# Altium PCB Robonaut2.PcbDoc
Units mm, origin at the board's own origin, x right, y up, seen from the top; angles counter-clockwise.
Board outline 105.5 x 105 mm, 2 copper layers (Top Layer, Bottom Layer); 57 components, 72 nets, 320 pads, 37 vias.
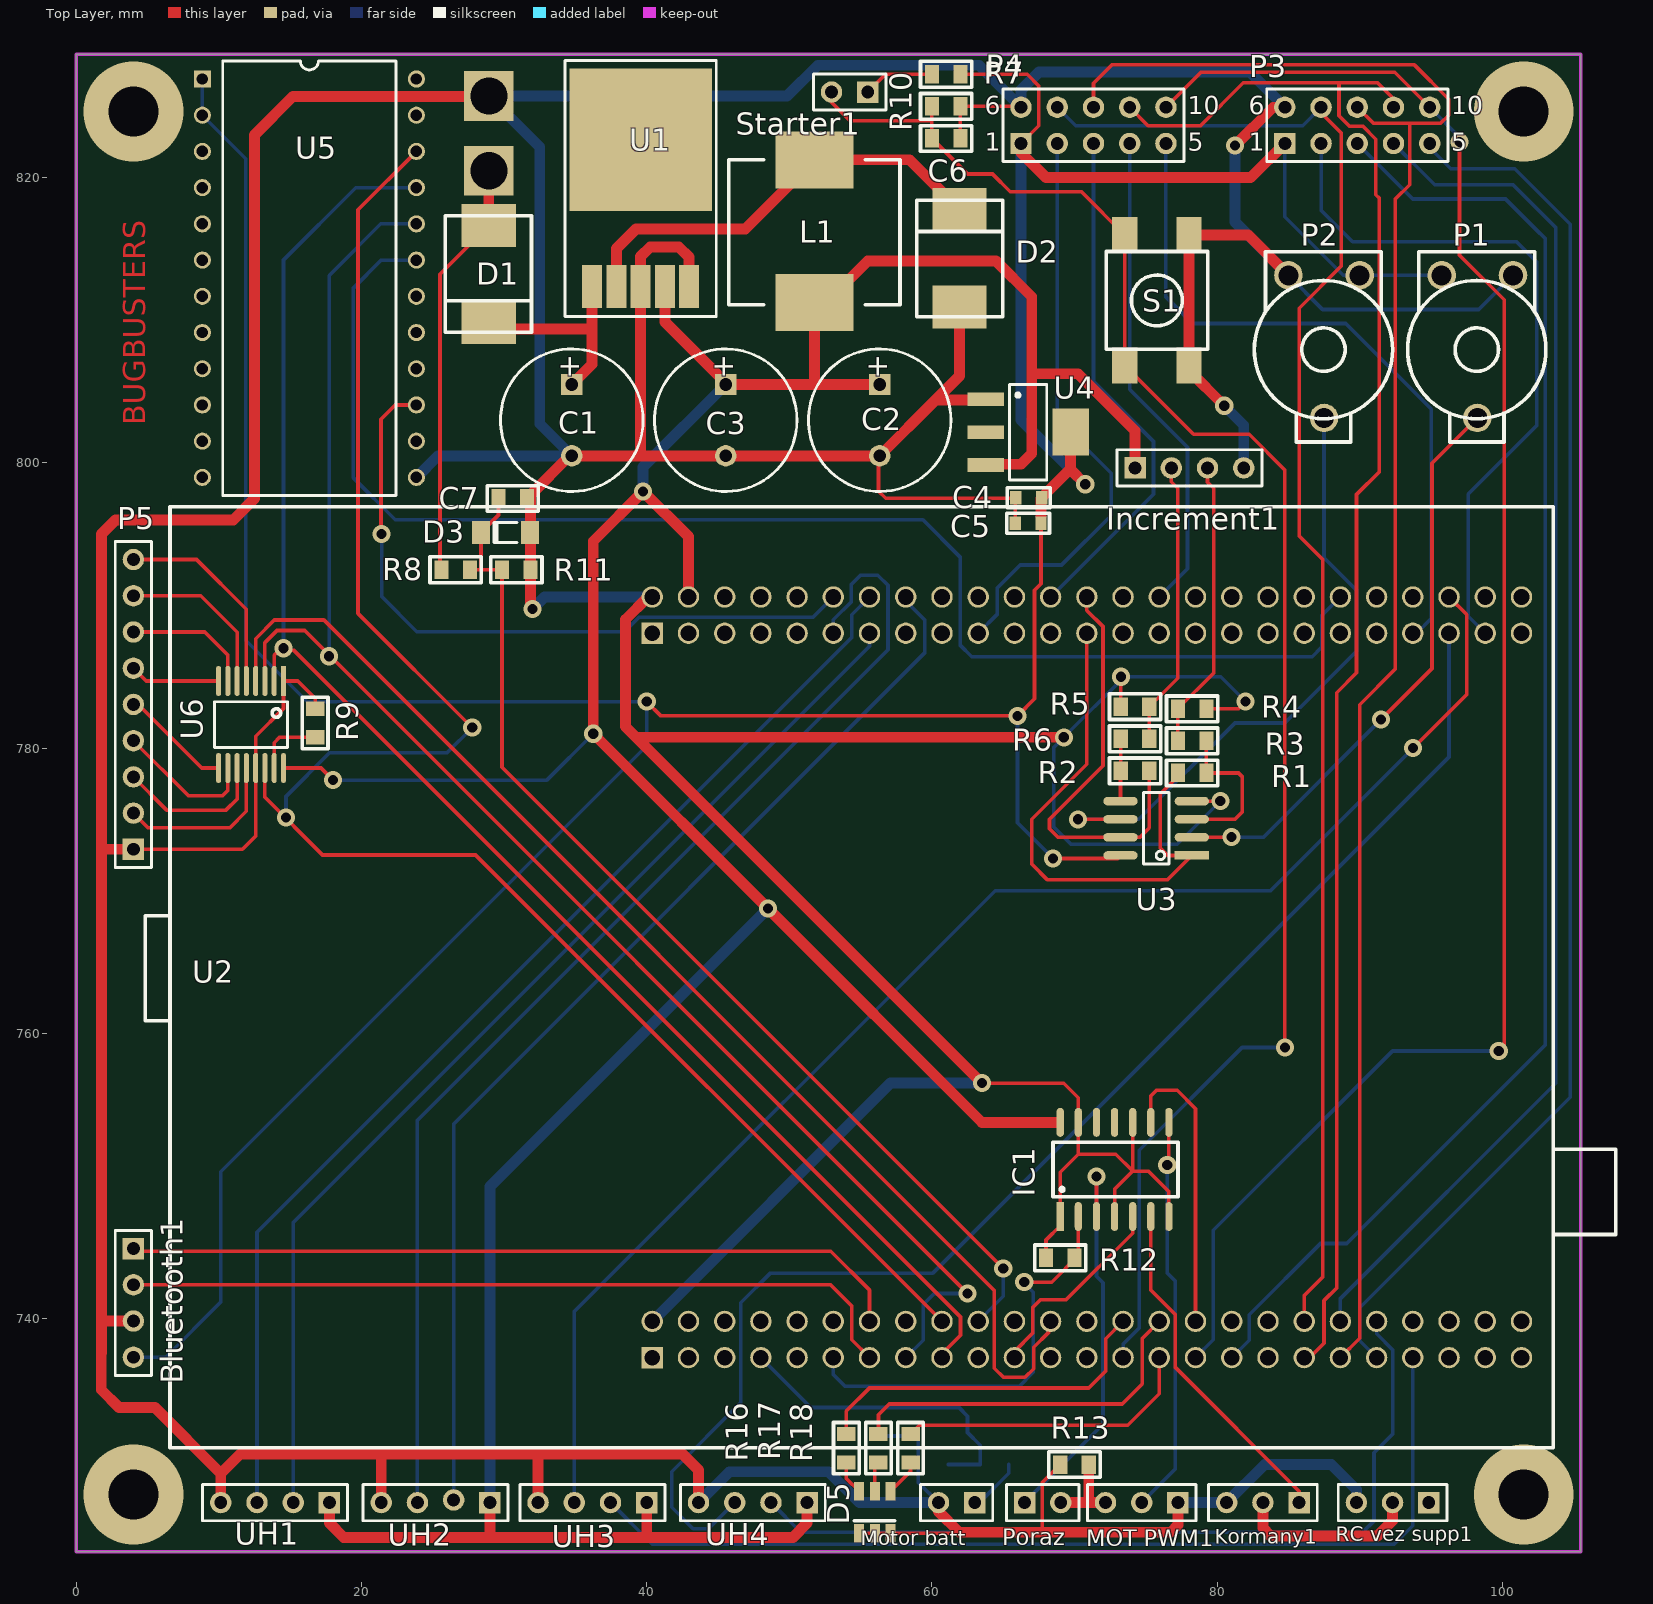
[diagram p0: Top Layer view]
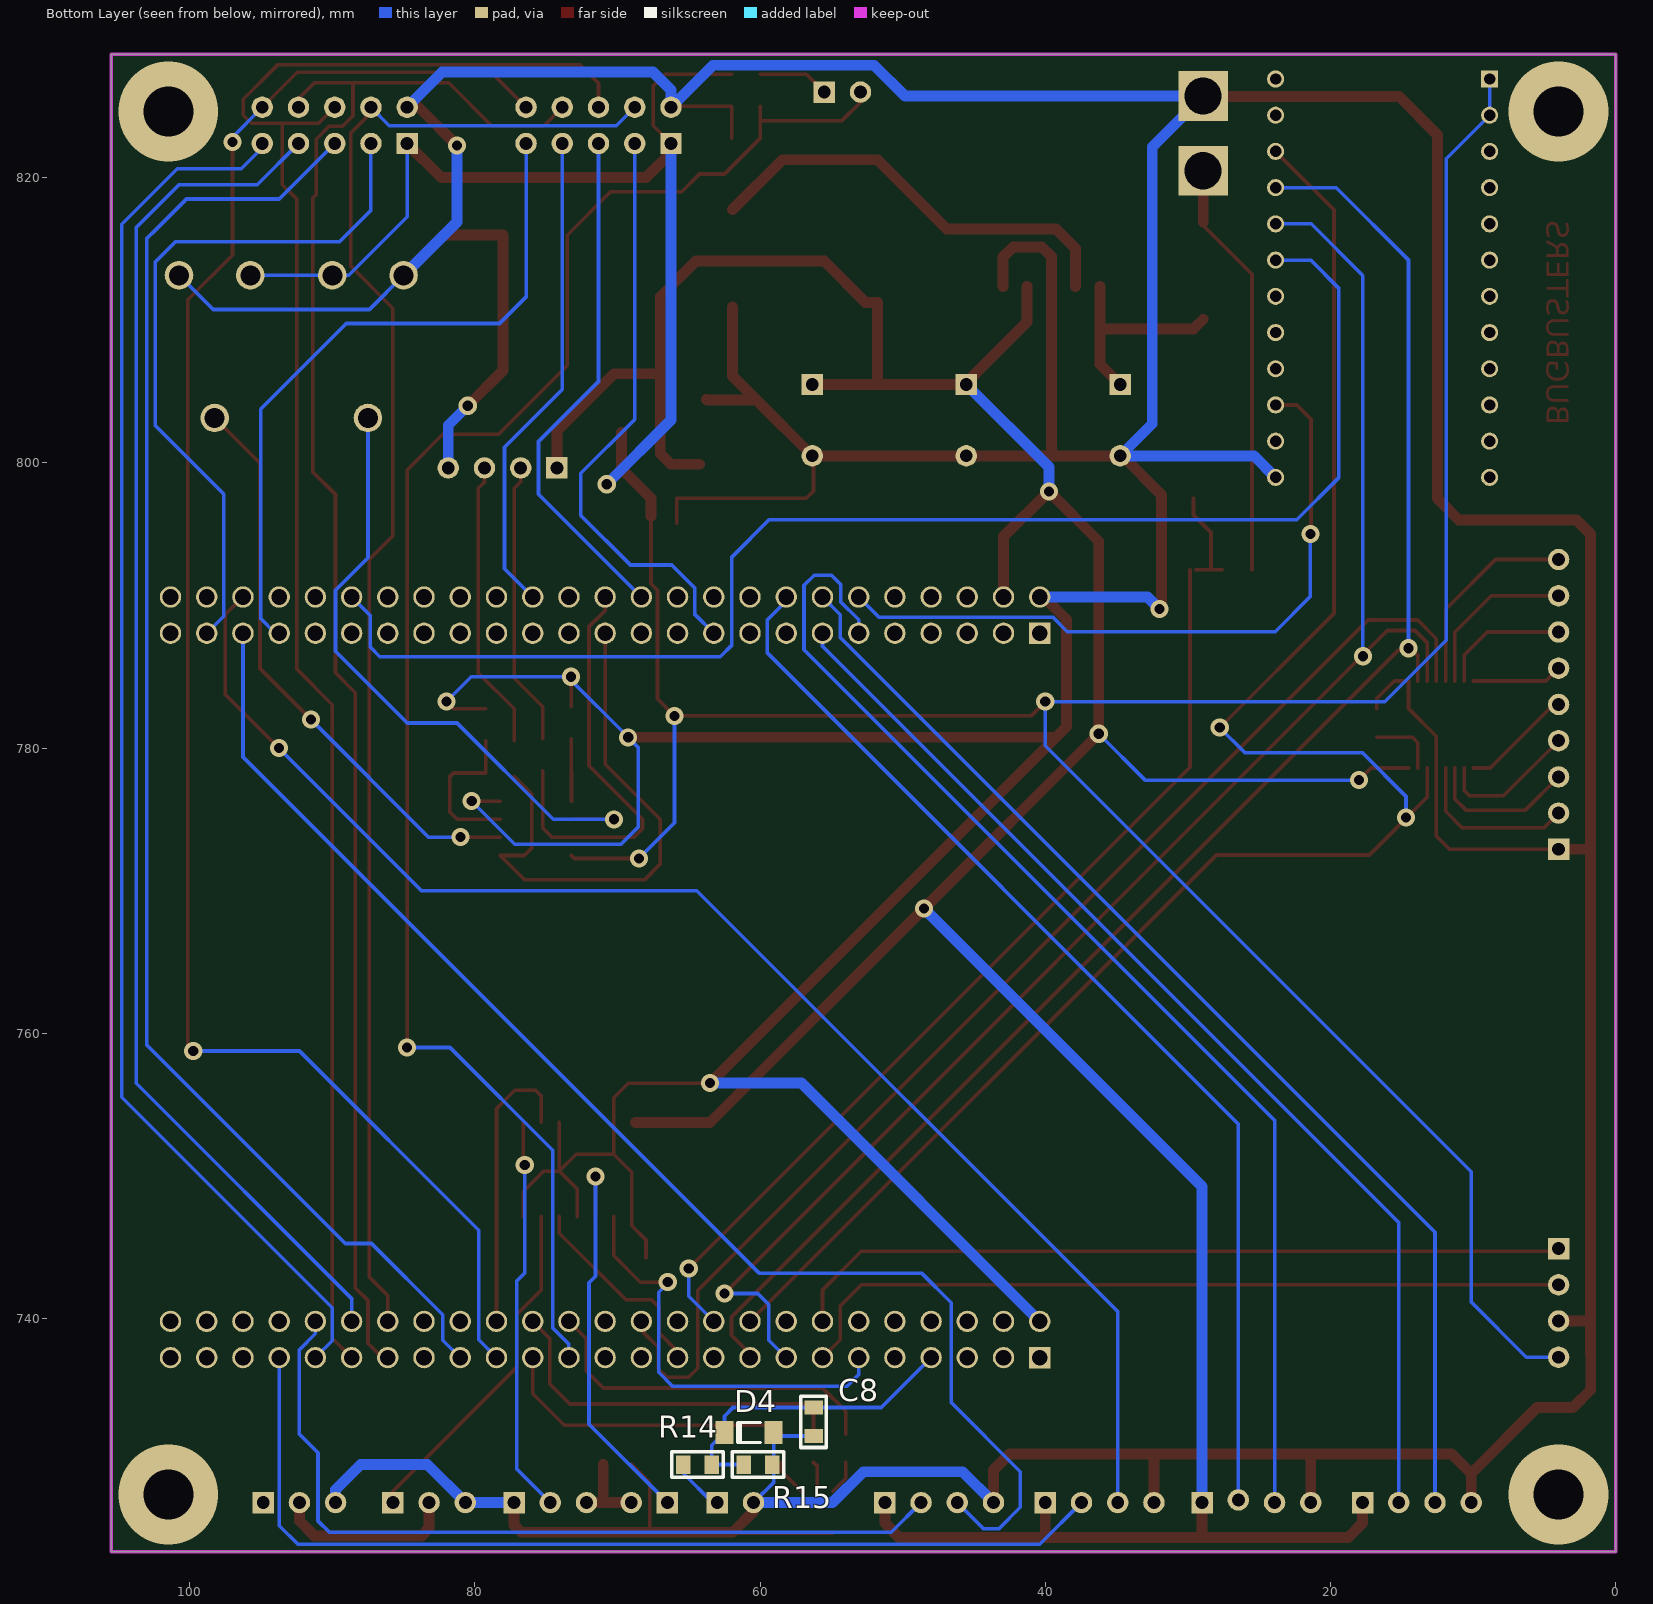
[diagram p1: Bottom Layer view, seen from below]
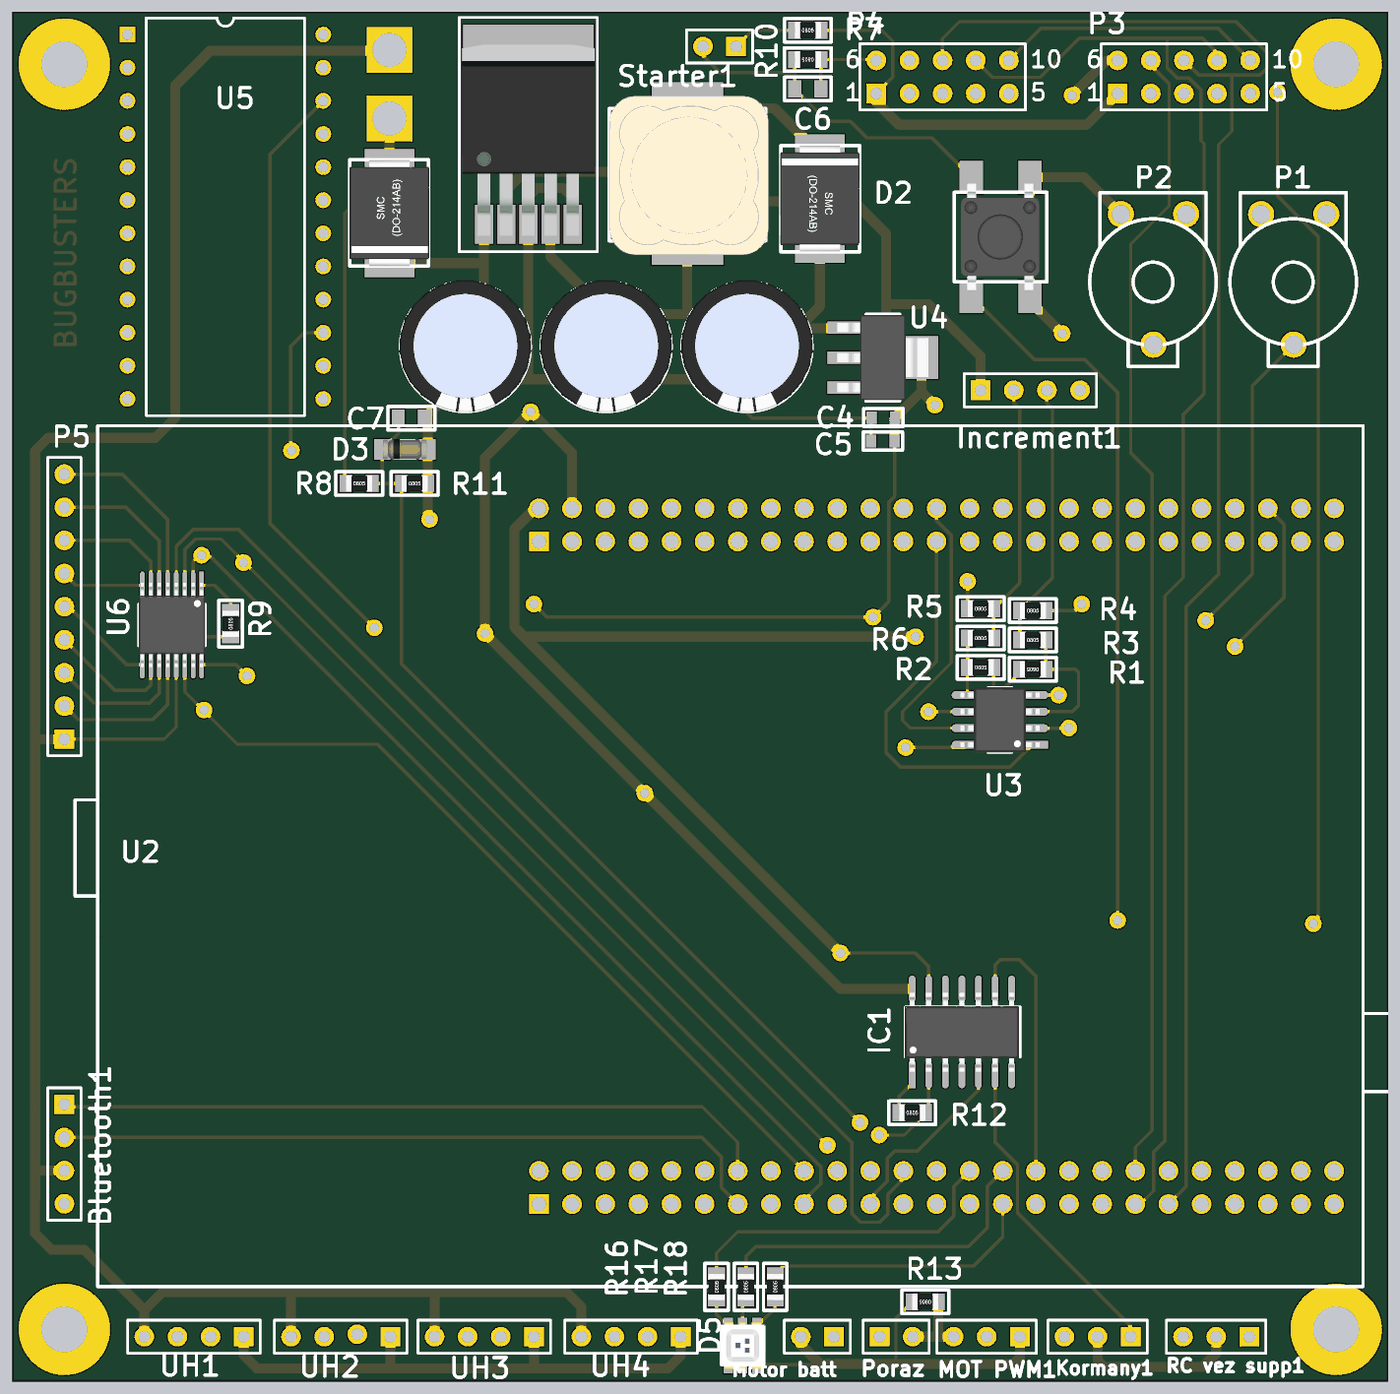
[diagram p2: 3D render of the assembled board from above, using the file's embedded part models]
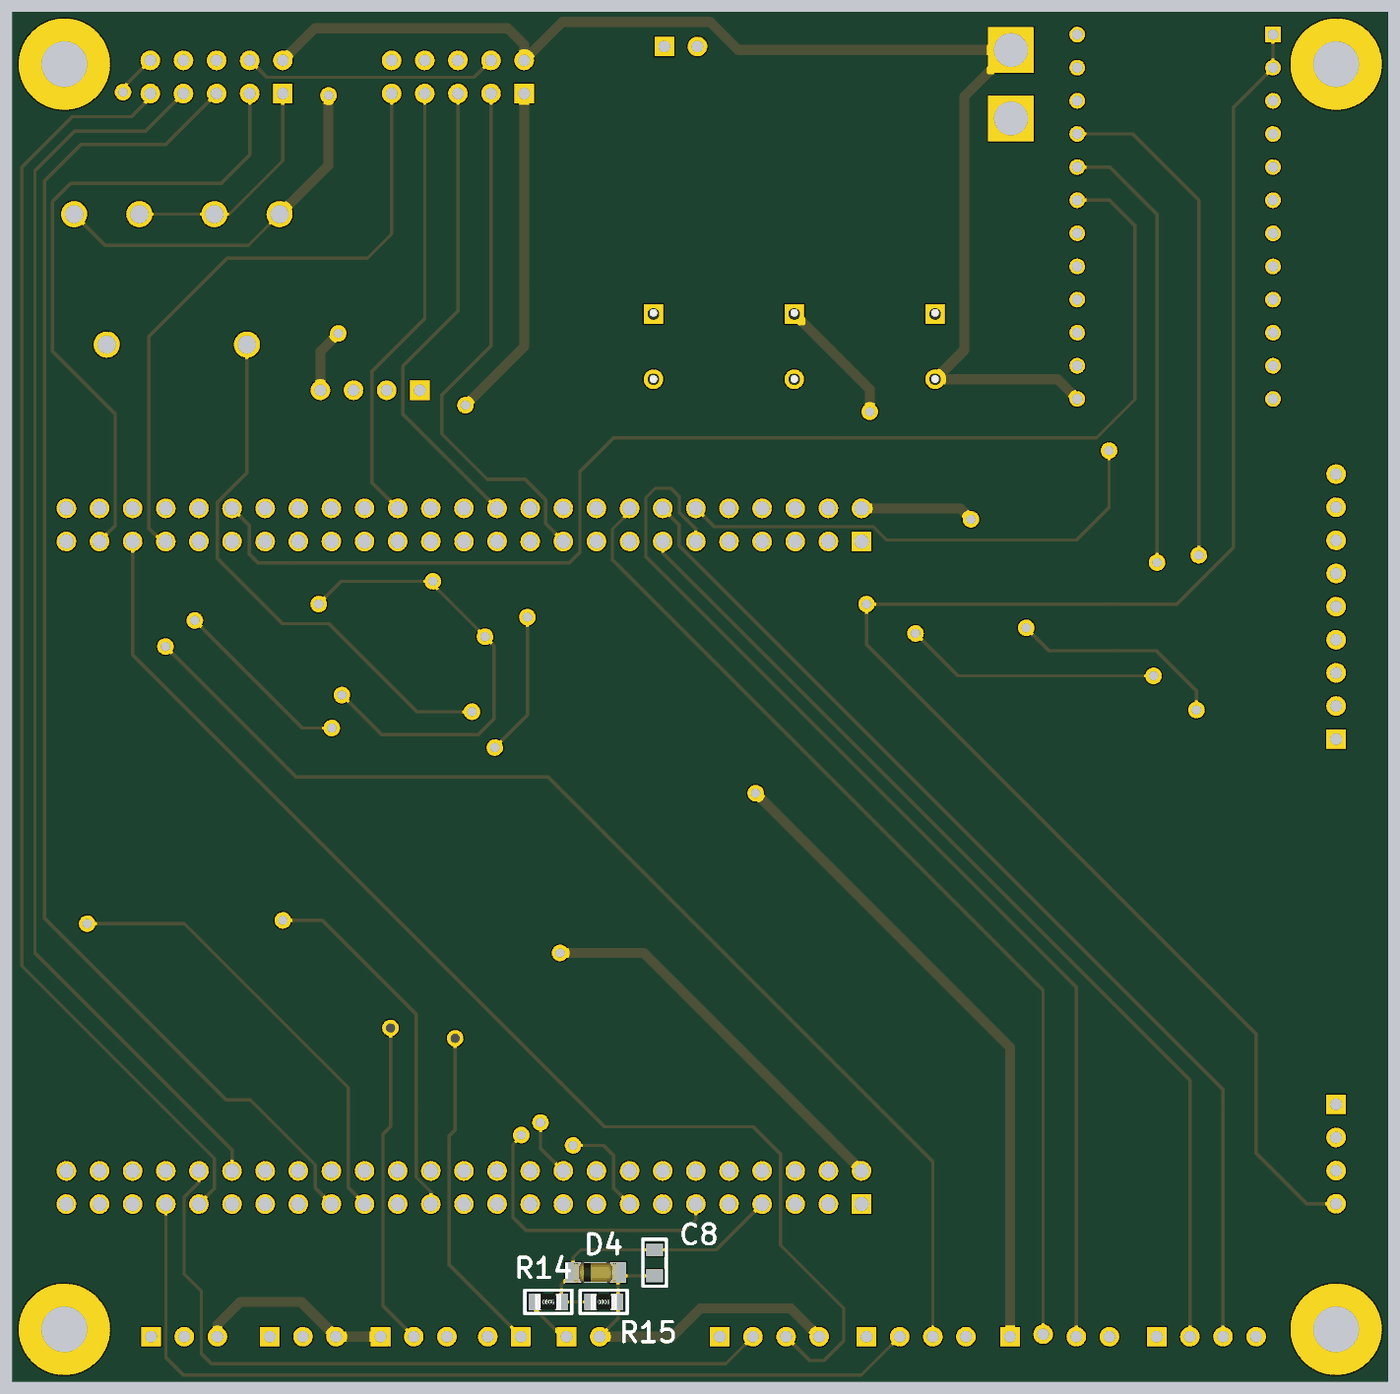
[diagram p3: 3D render of the assembled board from below, using the file's embedded part models]

## Layer stack, top to bottom
Top Layer: signal copper 0.0356
Dielectric: dielectric 0.32, FR-4, Dk 4.8
Bottom Layer: signal copper 0.0356

## Board outline
0,723.646 105.5,723.646 105.5,828.646 0,828.646

## Design rules (kind name [scope] priority, off if disabled: settings)
Clearance [All] p1: gap=0.254
HoleSize [All] p1: absolutevalues=TRUE maxlimit=4 minlimit=0.025 maxpercent=80.000 minpercent=20.000
MinimumSolderMaskSliver MinimumSolderMaskSliver_U6 [InComponent('U6')  or InComponent('U1')  or InComponent('D5')] p1: minsoldermaskwidth=0.051
MinimumSolderMaskSliver [All] p2: minsoldermaskwidth=0.254
PolygonConnect [All] p1: connectstyle=Relief reliefconductorwidth=0.254 reliefentries=4 polygonreliefangle="90 Angle"
RoutingVias [All] p1: holewidth=0.711 width=1.27 viastyle="Through Hole" minholewidth=0.711 minwidth=1.27 maxholewidth=4 maxwidth=8
SilkToSilkClearance [All] p1 off: silktosilkclearance=0.254
SilkscreenOverComponentPads [All] p1 off: minsilkscreentomaskgap=0.254
SolderMaskExpansion [All] p1: expansion=0.102
Width [All] p1: maxlimit=1.524 minlimit=0.254 preferedwidth=0.254
24 further rules are at their usual default settings.

## Components (designator, comment, footprint, x,y, rotation, side; value= is the part's Value field where it differs from the comment)
Bluetooth1 "Header 4" HDR1X4#1 4,744.896 r270 top
C1 "470uF" cap_10x12 34.746,803.041 r180 top
C2 "470uF" cap_10x12 56.336,803.041 r180 top
C3 "470uF" cap_10x12 45.541,803.041 r180 top
C4 "10uF" FP_0603_CAP_080 66.79,797.546 r0 top
C5 "10uF" FP_0603_CAP_080 66.75,795.75 r0 top
C6 "100nF" FP_0805_CAP_085 61,822.75 r180 top
C7 "100nF" FP_0805_CAP_085 30.604,797.5 r180 top
C8 "100nF" FP_0805_CAP_085 56.25,732.75 r90 bottom
D1 "SS54" "FP_SMA DO214AB" 28.925,813.233 r270 top
D2 "SS54" "FP_SMA DO214AB" 61.924,814.344 r90 top
D3 "ZENER 3V3" sod-80 30.227,795.111 r90 top
D4 "ZENER 3V3" sod-80 60.646,732 r90 bottom
D5 "LED_RGB_6_PIN" LED_PLCC-6 56,726.396 r270 top
IC1 "74HC125" Gate_SOIC14 69,747.146 r0 top
Increment1 "Header 4" HDR1X4#1 74.25,799.646 r0 top
Kormany1 "Header 3" HDR1X3 85.75,727.083 r180 top
L1 "470uH" SRR1206_T 51.764,816.249 r270 top
"MOT PWM1" "Header 3" HDR1X3 77.25,727.083 r180 top
"Motor batt" "Header 2" HDR1X2 63,727.083 r180 top
P1 "10k" "Res Trimmer TH" 100.75,813.146 r180 top
P2 "10k" "Res Trimmer TH" 90,813.146 r180 top
P3 "Header 5X2A" HDR2X5_CEN 84.75,822.396 r0 top
P4 "Header 5X2A" HDR2X5_CEN 66.25,822.396 r0 top
P5 "Header 9" HDR1X9 4,772.896 r90 top
Poraz "Header 2" HDR1X2 66.5,727.083 r0 top
R1 "1M" FP_0805_RES 78.25,778.25 r180 top
R2 "1M" FP_0805_RES 74.25,778.396 r0 top
R3 "20k" FP_0805_RES 78.25,780.5 r0 top
R4 "xR" FP_0805_RES 78.25,782.75 r0 top
R5 "xR" FP_0805_RES 74.25,782.896 r0 top
R6 "20k" FP_0805_RES 74.25,780.646 r0 top
R7 "1k" FP_0805_RES 61,827.25 r0 top
R8 "27K" FP_0805_RES 26.604,792.5 r0 top
R9 "10k" FP_0805_RES 16.75,781.75 r90 top
R10 "10k" FP_0805_RES 61,825 r180 top
R11 "3K" FP_0805_RES 30.854,792.5 r0 top
R12 "10k" FP_0805_RES 69,744.25 r0 top
R13 "10k" FP_0805_RES 70,729.75 r180 top
R14 "27K" FP_0805_RES 64.396,729.75 r180 bottom
R15 "3K" FP_0805_RES 60.146,729.75 r180 bottom
R16 "1k" FP_0805_RES 54,730.896 r90 top
R17 "1k" FP_0805_RES 56.25,730.896 r90 top
R18 "1k" FP_0805_RES 58.5,730.896 r90 top
"RC vez supp1" "Header 3" HDR1X3 94.846,727.083 r180 top
S1 "Button" "BUTTON_6X6 _SMD" 75.75,811.396 r90 top
Starter1 "Header 2" HDR1X2 55.5,826 r180 top
U1 "TS2576" "SUPPLY_TO-263 5" 39.572,817.519 r0 top
U2 "STM32_F4_KIT" FP_STM32F4DISC 40.386,737.251 r90 top locked
U3 "LM358" FP_SO8_MS012AA 75.726,774.37 r180 top
U4 "LD1117xx" SUPPLY_SOT223 66.75,802.146 r0 top
U5 "STEVAL-MKI107V2" "STEVAL-MKI107V2 DIL24 Adapter" 8.838,826.917 r0 top
U6 "STP08CP05" TSSOP16 12.25,781.646 r270 top
UH1 "Header 4" HDR1X4#1 17.75,727.083 r180 top
UH2 "Header 4" HDR1X4#2 29,727.083 r180 top
UH3 "Header 4" HDR1X4#1 40,727.083 r180 top
UH4 "Header 4" HDR1X4#1 51.25,727.083 r180 top

## Footprints (in the part's own frame and the unit in brackets; to place one, negate y for a bottom-side part, rotate by r counter-clockwise, add the part's x,y. Pads: shape width x height; smd on the part's side, far side on the other; paste and mask are expansions set on the pad)
"BUTTON_6X6 _SMD" [mil]
  rect 100x70 smd: 1(-180,87.57) 1(180,87.57) 2(-180,-89.59) 2(180,-89.59)
  silkscreen extent -135,-141 135,139, body extent -160,-118 160,118, height 197
cap_10x12 [mm] "height: any, dia:10 RM5.0"
  round 1.5 hole 0.9: N(0,2.551)
  rect 1.5x1.5 hole 0.9: P(0,-2.449)
  silkscreen extent -5,-4.95 5,5.05, body extent -5.06,-5.04 5.06,5.08, height 13.2
FP_0603_CAP_080 [mm] "0.8mm magas 0603 kapacitás"
  rect 0.8x0.95 smd: 1(-0.9,0) 2(0.9,0)
  silkscreen extent -1.5,-0.7 1.5,0.7, body extent -0.8,-0.4 0.76,0.4, height 0.8
FP_0805_CAP_085 [mm] "0805 kapacitás YAGEO 0.85mm magas"
  rect 1x1.3 smd: 1(-1,0) 2(1,0)
  silkscreen extent -1.8,-0.9 1.8,0.9, body extent -1,-0.64 1.03,0.64, height 0.85
FP_0805_RES [mm] "0805 ellenállás"
  rect 1x1.3 smd: 1(-1,0) 2(1,0)
  silkscreen extent -1.8,-0.9 1.8,0.9, body extent -1,-0.62 1,0.63, height 0.62
"FP_SMA DO214AB" [mm] "SMA DO-214AB tok"
  rect 3x3.8 smd: A(-3.416,0) K(3.416,0)
  silkscreen extent -4.09,-3.05 4.06,3, body extent -4.07,-3.05 4.06,3.05, height 2.4
FP_SO8_MS012AA [mm] "SO8 JEDEC MS-012AA, Analog Devices R-8, SO8-SOT96-1, NS M08A"
  rect 2.4x0.6 smd: 1(-2.5,1.905)
  oval 2.4x0.6 smd: 2(-2.5,0.635) 3(-2.5,-0.635) 4(-2.5,-1.905) 5(2.5,-1.905) 6(2.5,-0.635) 7(2.5,0.635) 8(2.5,1.905)
  silkscreen extent -0.9,-2.5 0.9,2.5, body extent -3.03,-2.5 3.03,2.5, height 1.9
FP_STM32F4DISC [mm] "STM32 F4 Discovery evaluation board"
  rect 1.5x1.5 hole 1.1: 1(0,0) 51(50.8,0)
  round 1.5 hole 1.1: 2(2.54,0) 3(0,-2.54) 4(2.54,-2.54) 5(0,-5.08) 6(2.54,-5.08) 7(0,-7.62) 8(2.54,-7.62) 9(0,-10.16) 10(2.54,-10.16) 11(0,-12.7) 12(2.54,-12.7) 13(0,-15.24) 14(2.54,-15.24) 15(0,-17.78) 16(2.54,-17.78) 17(0,-20.32) 18(2.54,-20.32) 19(0,-22.86) 20(2.54,-22.86) 21(0,-25.4) 22(2.54,-25.4) 23(0,-27.94) 24(2.54,-27.94) 25(0,-30.48) 26(2.54,-30.48) 27(0,-33.02) 28(2.54,-33.02) 29(0,-35.56) 30(2.54,-35.56) 31(0,-38.1) 32(2.54,-38.1) 33(0,-40.64) 34(2.54,-40.64) 35(0,-43.18) 36(2.54,-43.18) 37(0,-45.72) 38(2.54,-45.72) 39(0,-48.26) 40(2.54,-48.26) 41(0,-50.8) 42(2.54,-50.8) 43(0,-53.34) 44(2.54,-53.34) 45(0,-55.88) 46(2.54,-55.88) 47(0,-58.42) 48(2.54,-58.42) 49(0,-60.96) 50(2.54,-60.96) 52(53.34,0) 53(50.8,-2.54) 54(53.34,-2.54) 55(50.8,-5.08) 56(53.34,-5.08) 57(50.8,-7.62) 58(53.34,-7.62) 59(50.8,-10.16) 60(53.34,-10.16) 61(50.8,-12.7) 62(53.34,-12.7) 63(50.8,-15.24) 64(53.34,-15.24) 65(50.8,-17.78) 66(53.34,-17.78) 67(50.8,-20.32) 68(53.34,-20.32) 69(50.8,-22.86) 70(53.34,-22.86) 71(50.8,-25.4) 72(53.34,-25.4) 73(50.8,-27.94) 74(53.34,-27.94) 75(50.8,-30.48) 76(53.34,-30.48) 77(50.8,-33.02) 78(53.34,-33.02) 79(50.8,-35.56) 80(53.34,-35.56) 81(50.8,-38.1) 82(53.34,-38.1) 83(50.8,-40.64) 84(53.34,-40.64) 85(50.8,-43.18) 86(53.34,-43.18) 87(50.8,-45.72) 88(53.34,-45.72) 89(50.8,-48.26) 90(53.34,-48.26) 91(50.8,-50.8) 92(53.34,-50.8) 93(50.8,-53.34) 94(53.34,-53.34) 95(50.8,-55.88) 96(53.34,-55.88) 97(50.8,-58.42) 98(53.34,-58.42) 99(50.8,-60.96) 100(53.34,-60.96)
  silkscreen extent -6.33,-67.56 59.67,35.56, body extent -6.33,-67.69 59.67,35.56, height 24.6
Gate_SOIC14 [mil] "SOIC-14 egyesek szerint narrow, RET szerint normál"
  rect 20x80 smd: 1(0,0)
  oval 20x80 smd: 2(50,0) 3(100,0) 4(150,0) 5(200,0) 6(250,0) 7(300,0) 8(300,260) 9(250,260) 10(200,260) 11(150,260) 12(100,260) 13(50,260) 14(0,260)
  silkscreen extent -20,55 325,205, body extent -22,10 322,248, height 63
HDR1X2 [mm] "Connector; Header; 2 Position"
  rect 1.5x1.5 hole 0.9: 1(0,0)
  round 1.5 hole 0.9: 2(2.54,0)
  silkscreen extent -1.27,-1.27 3.81,1.27
HDR1X3 [mm] "Connector; Header; 3 Position"
  rect 1.5x1.5 hole 0.9: 1(0,0)
  round 1.5 hole 0.9: 2(2.54,0) 3(5.08,0)
  silkscreen extent -1.27,-1.27 6.35,1.27
HDR1X4#1 [mm] "Connector; Header; 4 Position"
  rect 1.5x1.5 hole 0.9: 1(0,0)
  round 1.5 hole 0.9: 2(2.54,0) 3(5.08,0) 4(7.62,0)
  silkscreen extent -1.27,-1.27 8.89,1.27
HDR1X4#2 [mm] "Connector; Header; 4 Position"
  rect 1.5x1.5 hole 0.9: 1(0,0)
  round 1.5 hole 0.9: 2(2.54,-0.187) 3(5.08,0) 4(7.62,0)
  silkscreen extent -1.27,-1.27 8.89,1.27
HDR1X9 [mm] "Connector; Header; 9 Position"
  rect 1.5x1.5 hole 0.9: 1(0,0)
  round 1.5 hole 0.9: 2(2.54,0) 3(5.08,0) 4(7.62,0) 5(10.16,0) 6(12.7,0) 7(15.24,0) 8(17.78,0) 9(20.32,0)
  silkscreen extent -1.27,-1.27 21.59,1.27
HDR2X5_CEN [mm] "Connector; Header; 5x2 Position"
  rect 1.5x1.5 hole 0.9: 1(0,0)
  round 1.5 hole 0.9: 2(2.54,0) 3(5.08,0) 4(7.62,0) 5(10.16,0) 6(0,2.54) 7(2.54,2.54) 8(5.08,2.54) 9(7.62,2.54) 10(10.16,2.54)
  silkscreen extent -1.27,-1.27 11.43,3.81
LED_PLCC-6 [mm]
  rect 1.3x0.7 smd: A1(-1.475,-1.1) A2(-1.475,0) A3(-1.475,1.1) K1(1.475,-1.1) K2(1.475,0) K3(1.475,1.1)
  silkscreen extent 0.57,-1.45 0.57,1.4, body extent -1.8,-1.75 1.8,1.75, height 2.01
"Res Trimmer TH" [mm]
  round 2 hole 1.4: 1(0,0) 2(2.5,10) 3(5,0)
  silkscreen extent -2.31,-1.65 7.39,11.68
sod-80 [mm]
  rect 1.6x1.25 smd: A(0,-1.598) K(0,1.852)
  silkscreen extent -0.7,-0.67 0.7,0.93, body extent -0.76,-1.55 0.78,1.8
SRR1206_T [mm] "POWER INDUCTOR"
  rect 4x5.5 smd: 1(-5,0) 2(5,0)
  silkscreen extent -5,-6 5.16,6, body extent -5.97,-5.97 6.23,6.23, height 6
"STEVAL-MKI107V2 DIL24 Adapter" [mm]
  rect 1.2x1.2 hole 0.8: 1(0,0)
  round 1.2 hole 0.8: 2(0,-2.54) 3(0,-5.08) 4(0,-7.62) 5(0,-10.16) 6(0,-12.7) 7(0,-15.24) 8(0,-17.78) 9(0,-20.32) 10(0,-22.86) 11(0,-25.4) 12(0,-27.94) 13(15.01,-27.94) 14(15.01,-25.4) 15(15.01,-22.86) 16(15.01,-20.32) 17(15.01,-17.78) 18(15.01,-15.24) 19(15.01,-12.7) 20(15.01,-10.16) 21(15.01,-7.62) 22(15.01,-5.08) 23(15.01,-2.54) 24(15.01,0)
  silkscreen extent 1.43,-29.21 13.58,1.27
SUPPLY_SOT223 [mm] "SOT223 package, 3 leads"
  rect 2.55x0.95 smd: 1(-2.975,2.3) 2(-2.975,0) 3(-2.975,-2.3)
  rect 2.55x3.3 smd: 2(2.975,0)
  silkscreen extent -1.3,-3.35 1.3,3.35, body extent -3.5,-3.25 3.5,3.25, height 1.65
"SUPPLY_TO-263 5" [mm]
  rect 1.4x3 smd: 1(-3.4,-5.15) 2(-1.7,-5.15) 3(0,-5.15) 4(1.7,-5.15) 5(3.4,-5.15)
  rect 10x10 smd: 6(0,5.15)
  silkscreen extent -5.3,-7.25 5.3,10.7, body extent -5.08,-6.02 5.08,8.62, height 4.57
TSSOP16 [mm] "STP08CP05 TSSOP16 package, TSOP65P640X120-16N"
  rect 2.1x0.35 smd: 1(-3.05,2.275)
  oval 2.1x0.35 smd: 2(-3.05,1.625) 3(-3.05,0.975) 4(-3.05,0.325) 5(-3.05,-0.325) 6(-3.05,-0.975) 7(-3.05,-1.625) 8(-3.05,-2.275) 9(3.05,-2.275) 10(3.05,-1.625) 11(3.05,-0.975) 12(3.05,-0.325) 13(3.05,0.325) 14(3.05,0.975) 15(3.05,1.625) 16(3.05,2.275)
  silkscreen extent -1.6,-2.55 1.6,2.55, body extent -3.23,-2.55 3.23,2.55, height 1.35

## Part data
Bluetooth1 Increment1 UH1 UH2 UH3 UH4: "Header, 4-Pin"
C1 C2 C3: library part CAP_ELECT, "Polarized Capacitor"
C4 C5: library part Cap, "Capacitor"
C6 C7 C8: library part CAP, "Capacitor"
D1 D2: library part SCHOTTKY, "NXP - PMEG3020EJ,115 - SCHOTTKY RECT 30V 2A SOD323F"
D3 D4: library part ZENER, "Zener Diode"
Kormany1 "MOT PWM1" "RC vez supp1": "Header, 3-Pin"
L1: library part L
"Motor batt" Poraz Starter1: "Header, 2-Pin"
P1 P2: library part POTI
P3 P4: "Header, 5-Pin, Dual row"
P5: "Header, 9-Pin"
R1 R2 R3 R4 R5 R6 R7 R8 R9 R10 R11 R12 R13 R14 R15 R16 R17 R18: library part RES, "Resistor"
S1: library part SW-PB, "Switch"
U1: "5V 3A step down"
U2: library part STM32F4DISCOVERY, "STM32 F4 Discovery Evaluation Kit"
U3: "Low power dual operational amplifiers"
U4: "LD1117xx 3,3V lin reg"
U5: "Three-axis digital output gyroscope"
U6: "8 channel constant current LED driver"

## Free pads (board coordinates)
  rect 3.5x3.5 hole 2.6: 0(28.925,820.483) 0(28.925,825.733)

## Via types
v1: diameter 1.27, hole 0.711, Top Layer to Bottom Layer, 33 vias
v2: diameter 7, hole 3.5, Top Layer to Bottom Layer, 4 vias

## Nets (pads, with @x,y where several pads share a name; then routed paths per layer and width w, separated by ;. In a path a pad name is that pad's centre, name@x,y a point inside that pad or via, vN(x,y) a via of type N, cw(c..) or ccw(c..) an arc to the next point about the centre after c; other vN are vias at no path point)
3V3: Bluetooth1.4 C4.2 C5.2 P1.3 P2.1 P3.1 P4.1 R7.2 U3.8 U4.2 U5.1 U5.2 | length 272.8
  Top Layer w0.254: v1(40,783.25) 41,782.25 v1(66,782.25) 67.195,783.445 67.195,791.059 67.65,791.514 C5.2 67.65,796.25 ; R7.2 66.678,827.25 67.5,826.428 67.5,823.646 P4.1 ; v1(68.5,772.25) 73.011,772.25 U3.8
  Top Layer w0.762: P4.1 66.25,821.75 68,820 82.354,820 P3.1 ; 67.65,796.25 67.65,797.506 C4.2 69.725,799.581 ; U4.2@69.725,802.146 69.725,799.581 ; v1(70.75,798.5) 69.725,799.525 69.725,799.581
  Bottom Layer w0.254: Bluetooth1.4 6.264,737.276 10.135,741.147 10.135,750.291 40,780.156 v1(40,783.25) 16.19,783.25 11.887,787.552 11.887,821.328 U5.2 U5.1 ; v1(66,782.25) 66,774.75 v1(68.5,772.25) ; P3.1 84.75,817.25 88.854,813.146 P2.1 P1.3
  Bottom Layer w0.762: P4.1 66.25,803 v1(70.75,798.5)
5V: C2.P C3.P IC1.14 Increment1.1 L1.2 U1.4 U2.54 U4.3 U6.16 UH1.1 UH2.1 UH3.1 UH4.1 | length 264.3
  Top Layer w0.254: U6.16 17.154,778.596 v1(18,777.75)
  Top Layer w0.762: UH1.1 17.75,725.646 18.75,724.646 29.006,724.646 ; UH2.1 29,724.652 29.006,724.646 ; UH3.1 40,724.646 ; U1.4 41.272,809.886 45.668,805.49 51.778,805.49 ; U2.54 42.926,794.824 v1(39.75,798) 36.25,794.5 v1(36.25,781) v1(48.5,768.75) 63.5,753.75 68.732,753.75 ; UH4.1 51.25,725.646 50.25,724.646 40,724.646 ; C2.P 51.778,805.49 ; U4.3@64.25,799.896 66.25,799.896 67,800.646 67,806.25 ; Increment1.1 74.25,802.25 70.25,806.25 67,806.25 ; 29.006,724.646 40,724.646 ; 51.778,805.49 51.764,805.504 L1.2 52.603,811.249 55.5,814.146 64.5,814.146 67,811.646 67,806.25
  Bottom Layer w0.254: v1(18,777.75) 33,777.75 v1(36.25,781)
  Bottom Layer w0.762: UH2.1 29,749.25 v1(48.5,768.75) ; v1(39.75,798) 39.75,799.699 C3.P
8-20V: D1.A pad.0@28.925,820.483 R8.1 | length 29.2
  Top Layer w0.254: R8.1@25.5,792.5 25.5,813.224 D1.A
  Top Layer w0.762: D1.A@28.925,816.899 pad.0@28.925,820.483
AD3: U2.19
"AD4 IR": U2.22
AD_SEL1: P4.2 U2.69 | length 41.5
  Bottom Layer w0.254: U2.69 64.592,789.397 64.592,791.235 66.192,792.836 69.092,792.836 72.568,796.311 72.568,799.266 68.79,803.044 P4.2
AD_SEL2: P4.3 U2.74 | length 36.5
  Bottom Layer w0.254: U2.74 75.54,797.805 75.54,801.497 71.33,805.707 P4.3
AD_SEL3: P4.4 U2.80 | length 34.3
  Bottom Layer w0.254: P4.4 73.87,805.148 77.921,801.097 77.921,792.566 U2.80
AD_SEL4: P3.2 U2.97 | length 49.8
  Bottom Layer w0.254: P3.2 87.29,817.71 89.5,815.5 101,815.5 102.413,814.087 102.413,802.615 97.607,797.809 97.607,789.25 U2.97
AD_SEL5: P3.3 U2.33 | length 104.6
  Bottom Layer w0.254: U2.33 82.25,738.475 82.25,740.25 87.25,745.25 89.092,745.25 103.022,759.181 103.022,815.704 102.363,816.363 100.226,818.5 93.726,818.5 P3.3
AD_SEL6: P3.4 U2.40 | length 96.8
  Bottom Layer w0.254: U2.40 88.646,741.396 103.75,756.5 103.75,816.5 100.75,819.5 95.266,819.5 P3.4
DIR: IC1.9 U2.32 | length 20.6
  Top Layer w0.254: IC1.9 75.35,755.6 75.75,756 77.196,756 78.486,754.71 U2.32
DIRECTION: "MOT PWM1.2" IC1.8 | length 27.9
  Top Layer w0.254: v1(76.5,750.75) 76.62,750.87 IC1.8
  Bottom Layer w0.254: 74.71,727.083 77.077,729.45 77.077,742.606 76.5,743.183 v1(76.5,750.75)
ECHO1: U2.64 UH1.3 | length 81.3
  Bottom Layer w0.254: UH1.3 12.67,746.036 54.381,787.747 54.381,789.346 U2.64
ECHO2: U2.61 UH2.3 | length 85.1
  Bottom Layer w0.254: UH2.3 23.92,753.891 56.921,786.892 56.921,791.413 56.21,792.124 54.991,792.124 54.356,791.489 54.356,790.262 53.086,788.992 U2.61
ECHO3: U2.96 UH3.3 | length 101.5
  Top Layer w0.254: v1(93.75,780) 97.5,783.75 97.5,789.357 U2.96
  Bottom Layer w0.254: UH3.3 34.92,740.481 64.439,770 83.75,770 v1(93.75,780) ; U2.96@96.266,790.313 U2.96
ECHO4: U2.95 UH4.3 | length 96.4
  Bottom Layer w0.254: UH4.3 44.337,725.25 43.25,725.25 41.75,726.75 41.75,729.25 46.597,734.097 46.597,741.097 48.679,743.179 60.071,743.179 96.266,779.374 U2.95
ENC_A: Increment1.3 R3.1 R4.1 | length 20.4
  Top Layer w0.254: R3.1 R4.1 79.756,785.256 79.756,798.22 79.33,798.646 Increment1.3
ENC_B: Increment1.2 R5.2 R6.2 | length 20
  Top Layer w0.254: R6.2 R5.2 77.241,784.887 77.241,798.22 76.79,798.672 Increment1.2
ENCODER_A: R1.2 U2.75 U3.1 | length 38.2
  Top Layer w0.254: U2.75 70.866,778.866 67,775 67,771.86 68.11,770.75 76.511,770.75 U3.1 76.535,772.465 76,773 76,776.75 R1.2@77.25,778
ENCODER_B: R2.2 U2.76 U3.7 | length 29.8
  Top Layer w0.254: U2.76 70.866,789.65 71.997,788.519 71.997,778.747 68.25,775 68.25,774.344 68.844,773.75 73.211,773.75 U3.7 74.589,773.735 75.25,774.396 R2.2
GND: "MOT PWM1.1" "Motor batt.2" "RC vez supp1.3" Bluetooth1.3 C1.N C2.N C3.N C4.1 C5.1 C6.1 C7.1 C8.1 D2.A D3.A D4.A D5.K1 D5.K2 D5.K3 IC1.1 IC1.4 IC1.7 IC1.10 IC1.13 Increment1.4 Kormany1.3 P1.1 P2.3 P3.6 P4.6 P5.1 pad.0@28.925,825.733 R4.2 R5.1 R9.2 R10.1 R11.2 R12.1 R13.2 R15.2 S1.2 U1.3 U1.5 U2.2 U2.52 U3.4 U4.1 U5.13 U6.1 U6.13 UH1.4 UH2.4 UH3.4 UH4.4 | length 721.3
  Top Layer w0.254: P5.1 11.646,772.896 12.575,773.825 U6.13 12.575,780.825 14.525,782.775 U6.1 15.531,784.696 16.75,783.477 R9.2 ; C1.N@34.746,800.142 C1.N ; D5.K1 66.921,724.921 67,725 ; C2.N 56.25,800.404 56.25,798.012 56.756,797.506 65.85,797.506 C5.1 ; C6.1 R10.1 66.186,825 P4.6 ; v1(63.5,756.5) 69.25,756.5 70.27,755.48 IC1.13 70.27,751.52 ; 67.75,725.043 67.75,728.5 R13.2 ; R12.1 68,745.5 69,746.5 IC1.1 69,750.25 70.27,751.52 ; IC1.4 72.81,749.06 74.08,750.33 ; R5.1 v1(73.25,785) ; IC1.10 74.08,750.33 ; IC1.7 76.62,748.88 75.17,750.33 74.08,750.33 ; U3.4 v1(80.225,776.275) ; R4.2 81.5,782.75 v1(82,783.25) ; 70.27,751.52 72.89,751.52 74.08,750.33
  Top Layer w0.762: 1.866,772.896 P5.1 ; 1.946,739.816 Bluetooth1.3 ; UH1.4 10.13,729.13 ; UH2.4 21.38,730.37 ; pad.0@28.925,825.733 28.874,825.682 15.182,825.682 12.5,823 12.5,797.5 11,796 2.75,796 1.762,795.012 1.762,737.578 1.75,737.566 1.75,735 3,733.75 5.51,733.75 10.13,729.13 ; v1(32,789.75) 31.854,789.604 R11.2 31.854,797.75 34.594,800.49 C1.N 39.25,800.49 ; UH3.4 32.38,730.37 ; U2.52 40.091,790.591 38.5,789 38.5,781.5 39.25,780.75 ; U1.5 42.972,814.424 42.25,815.146 40.25,815.146 39.572,814.468 U1.3 39.572,800.812 39.25,800.49 ; UH4.4 43.63,729.37 42.5,730.5 11.5,730.5 10.13,729.13 ; 60.46,727.083 60.46,726.461 61.921,725 67,725 76.75,725 77.25,725.5 77.25,727.083 ; D2.A 61.924,806.078 60.25,804.404 ; v1(63.5,756.5) 39.25,780.75 ; U4.1 63.733,804.404 60.25,804.404 ; v1(69.25,780.75) 39.25,780.75 ; v1(80.5,804) 78.026,806.474 78.026,806.824 78.026,815.968 82.178,815.968 P2.3 ; v1(81.25,822.25) 83.936,824.936 P3.6 ; 39.25,800.49 C3.N C2.N 60.25,804.404
  Bottom Layer w0.254: C8.1 58.798,731.75 D4.A 59.048,728.495 60.46,727.083 ; v1(80.225,776.275) 77.2,773.25 69.75,773.25 68.555,774.445 68.555,780.055 v1(69.25,780.75) 73.5,785 80.25,785 v1(82,783.25) ; P2.3 87.396,810.75 98.354,810.75 P1.1
  Bottom Layer w0.762: U5.13 25.361,800.49 C1.N 32.5,802.736 32.5,822.158 28.925,825.733 49.849,825.733 52,827.884 63.302,827.884 P4.6 66.25,826.146 67.5,827.396 82.29,827.396 P3.6 ; v1(32,789.75) 32.841,790.591 U2.52 ; U2.2 57.095,756.5 v1(63.5,756.5) ; UH4.4 45.797,729.25 52.75,729.25 54.917,727.083 60.46,727.083 ; 77.25,727.083 Kormany1.3 83.337,729.75 88,729.75 89.766,727.984 89.766,727.083 ; v1(80.5,804) 81.87,802.63 Increment1.4 ; v1(81.25,822.25) 81.25,816.896 P2.3
GYRO_CS: U2.90 U5.19 | length 99.6
  Bottom Layer w0.254: U5.19 21.381,814.217 19.431,812.267 19.431,798.94 22.371,796 59.37,796 61.976,793.394 61.976,787.222 62.789,786.409 86.665,786.409 87.325,787.07 87.325,789.28 88.637,790.591 U2.90
GYRO_IT: U2.62 U5.15 | length 49.1
  Top Layer w0.254: v1(21.412,795.02) 21.361,795.02 21.361,803.046 22.372,804.057 U5.15
  Bottom Layer w0.254: v1(21.412,795.02) 21.412,790.626 23.876,788.162 38.458,788.162 39.478,789.182 51.677,789.182 U2.62
KORM_PWM: IC1.6 Kormany1.1 | length 24.4
  Top Layer w0.254: IC1.6 75.35,741.986 77.077,740.259 77.077,736.552 85.75,727.879 Kormany1.1
KORMANY_PWM: IC1.5 U2.21 | length 14.4
  Top Layer w0.254: U2.21 65.786,737.682 67.081,738.977 67.081,740.766 67.615,741.299 69.403,741.299 74.08,745.976 IC1.5
LED-GYRO_MISO: U2.18 U5.22 U6.14 | length 126.7
  Top Layer w0.254: U6.14 13.225,776.537 17.262,772.5 27.997,772.5 U2.18 ; U5.22 19.756,817.745 19.756,789.437 v1(27.762,781.431)
  Bottom Layer w0.254: v1(14.707,775.132) 14.707,776.605 17.78,779.678 26.01,779.678 v1(27.762,781.431)
LED-GYRO_MOSI: U2.17 U5.21 U6.2 | length 111.2
  Top Layer w0.254: U6.2 13.875,786.518 14.224,786.867 15.23,786.867 62.001,740.095 62.001,738.824 U2.17@60.706,737.529
  Bottom Layer w0.254: v1(14.529,786.994) 14.529,814.222 19.603,819.297 U5.21
LED-GYRO_SCK: U2.15 U5.20 U6.3 | length 113.9
  Top Layer w0.254: U6.3 13.225,787.394 14.069,788.238 16.01,788.238 v1(62.5,741.749)
  Bottom Layer w0.254: v1(17.729,786.435) 17.729,813.13 21.356,816.757 U5.20 ; U2.15 59.385,738.47 59.385,740.969 60.165,741.749 v1(62.5,741.749) v1@62.25,741.499
LED_B: R16.2 U2.28 | length 24.9
  Top Layer w0.254: R16.2 54,733.5 55.623,735.123 71,735.123 72.187,736.31 72.187,738.572 U2.28
LED_CS: U2.24 U6.4 | length 87.3
  Top Layer w0.254: U6.4 12.575,787.663 13.886,788.975 17.364,788.975 64.377,741.961 64.377,736.51 65.024,735.863 66.523,735.863 67.132,736.473 67.132,737.972 68.174,739.013 68.174,739.639 U2.24
LED_G: R17.2 U2.30 | length 25.6
  Top Layer w0.254: R17.2 56.25,733.25 57,734 73.346,734 74.752,735.406 74.752,738.597 U2.30
LED_R: R18.2 U2.29 | length 21.1
  Top Layer w0.254: R18.2 59.104,732.5 73.726,732.5 75.946,734.72 U2.29
M_BATT: C8.2 D4.K R14.2 R15.1 U2.7 | length 22.2
  Bottom Layer w0.254: U2.7 51.507,733.75 C8.2 61.896,733.75 62.498,733.148 D4.K 63.396,731.102 R14.2 R15.1
MOT_PWM: "MOT PWM1.3" Poraz.2 R13.1 | length 5.5
  Top Layer w0.762: Poraz.2 72.17,727.083 ; 71,727.333 R13.1
MOTOR_BATT: "Motor batt.1" R14.1 | length 3.9
  Bottom Layer w0.254: 63,727.083 63.333,727.083 65.396,729.146 R14.1
MOTOR_PWM: IC1.2 R12.2 U2.11 | length 29.5
  Top Layer w0.254: 67.158,742.544 68.398,742.544 70.27,744.416 IC1.2
  Bottom Layer w0.254: U2.11 53.086,736.067 53.924,735.228 66.116,735.228 67.107,736.219 67.107,741.832 v1@66.167,742.772
  other v1: 66.472,742.544
NetC1_P: C1.P D1.K U1.1 | length 15
  Top Layer w0.762: D1.K@28.925,810.067 29.596,809.396 36.172,809.396 ; C1.P 36.172,806.916 36.172,809.396 ; U1.1 36.172,809.396
NetD2_K: D2.K L1.1 U1.2 | length 30.7
  Top Layer w0.762: U1.2 37.872,815.018 39.25,816.396 46.911,816.396 L1.1 58.435,821.249 D2.K
NetD5_A1: D5.A1 R16.1 | length 2.4
  Top Layer w0.254: R16.1 54,728.771 D5.A1
NetD5_A2: D5.A2 R17.1 | length 2.1
  Top Layer w0.254: D5.A2 56,729.646 R17.1
NetD5_A3: D5.A3 R18.1 | length 2.6
  Top Layer w0.254: D5.A3 58.5,729.271 R18.1
NetIC1_3: IC1.3 Poraz.1 | length 28.2
  Top Layer w0.254: IC1.3 v1(71.54,749.96)
  Bottom Layer w0.254: Poraz.1 71.997,732.58 71.997,742.505 71.54,742.962 v1(71.54,749.96)
NetP1_2: P1.2 U3.2 | length 40.6
  Top Layer w0.254: U3.2 80.985,773.735 v1(81,773.75) ; v1(91.5,782) 95.072,785.572 95.072,799.968 P1.2
  Bottom Layer w0.254: v1(81,773.75) 83.25,773.75 v1(91.5,782)
NetP2_2: P2.2 U3.6 | length 44.7
  Top Layer w0.254: v1(70.25,775) 70.255,775.005 U3.6
  Bottom Layer w0.254: v1(70.25,775) 74.5,775 81.25,781.75 84.75,781.75 89.777,786.777 89.777,791.059 87.5,793.336 P2.2
NetP5_2: P5.2 U6.12 | length 11.9
  Top Layer w0.254: P5.2 5.04,774.396 10.75,774.396 11.925,775.571 U6.12
NetP5_3: P5.3 U6.11 | length 10.7
  Top Layer w0.254: P5.3 6.33,775.646 10.5,775.646 11.275,776.421 U6.11
NetP5_4: P5.4 U6.10 | length 10
  Top Layer w0.254: P5.4 7.87,776.646 10.25,776.646 10.625,777.021 U6.10
NetP5_5: P5.5 U6.9 | length 7.8
  Top Layer w0.254: P5.5 4.34,783.056 8.8,778.596 U6.9
NetP5_6: P5.6 U6.8 | length 6.3
  Top Layer w0.254: P5.6 4.9,784.696 U6.8
NetP5_7: P5.7 U6.7 | length 9.1
  Top Layer w0.254: P5.7 9.01,788.136 10.625,786.521 U6.7
NetP5_8: P5.8 U6.6 | length 11.8
  Top Layer w0.254: P5.8 8.72,790.676 11.275,788.121 U6.6
NetP5_9: P5.9 U6.5 | length 14.4
  Top Layer w0.254: P5.9 8.43,793.216 11.925,789.721 U6.5
NetR1_1: R1.1 R3.2 U3.3 | length 11.1
  Top Layer w0.254: U3.3 81.255,775.005 81.75,775.5 81.75,778 81.5,778.25 R1.1 R3.2
NetR2_1: R2.1 R6.1 U3.5 | length 4.4
  Top Layer w0.254: U3.5 73.226,778.372 R2.1 R6.1
NetR7_1: R7.1 Starter1.1 | length 5
  Top Layer w0.254: Starter1.1 56.75,827.25 R7.1
NetR9_1: R9.1 U6.15 | length 4.8
  Top Layer w0.254: U6.15 13.875,780.375 14.25,780.75 R9.1
RX: Bluetooth1.1 U2.14 | length 55
  Top Layer w0.254: Bluetooth1.1 4.193,744.703 52.908,744.703 55.626,741.985 U2.14
SERVO_5V: "RC vez supp1.2" Kormany1.2 | length 12.8
  Top Layer w0.762: Kormany1.2 83.21,725.29 83.75,724.75 91.25,724.75 92.306,725.806 92.306,727.083
SFIFT_LE_1: P4.5 U2.93 | length 49
  Bottom Layer w0.254: P4.5 76.41,811.63 78.27,809.77 89.02,809.77 95.021,803.769 95.021,789.075 93.997,788.051 U2.93
SFIFT_LE_2: P3.5 U2.41 | length 98.5
  Bottom Layer w0.254: U2.41 90,738.437 90,740.75 104.766,755.516 104.766,816.734 100.883,820.617 96.383,820.617 94.91,822.09 P3.5
SHIFT_MISO: P3.7 P4.7 U2.38 | length 107.7
  Top Layer w0.254: U2.38 86.106,741.606 87.401,742.901 87.401,793.217 85.75,794.868 85.75,810.849 88.699,813.798 88.699,823.136 87.29,824.545 P3.7
  Bottom Layer w0.254: P4.7 70.08,823.646 86,823.646 P3.7
SHIFT_MOSI: P3.8 P4.8 U2.39 | length 124.9
  Top Layer w0.254: P4.8 71.33,826.624 72.61,827.904 93.837,827.904 96.241,825.5 96.241,824.382 95.663,823.805 90.961,823.805 P3.8 ; U2.39 90,738.605 90,783.039 92.481,785.52 92.481,818.481 93.501,819.501 93.501,823.804
SHIFT_OE: P3.10 P4.10 U2.31 | length 123.8
  Top Layer w0.254: P4.10 78.87,827.396 92.45,827.396 P3.10 ; v1(97,822.498) 97,814.562 100.127,811.435 100.127,759.127 v1(99.75,758.75)
  Bottom Layer w0.254: U2.31 79.731,738.496 79.731,746.176 92.305,758.75 v1(99.75,758.75) ; P3.10 97.096,822.75 97.096,822.595 v1(97,822.498)
SHIFT_SCK: P3.9 P4.9 U2.37 | length 114.9
  Top Layer w0.254: P4.9 75.16,823.646 78.842,823.646 81.842,826.646 91.25,826.646 92.37,825.526 P3.9 ; U2.37 86.501,737.251 87.5,738.25 87.5,741.25 88.381,742.131 88.381,783.884 89.777,785.28 89.777,797.777 91.381,799.381 91.381,818.549 91.135,818.794 91.135,822.69 90.23,823.595 89.281,823.595 88.544,824.332 88.544,826.646
STARTER: C6.2 R10.2 S1.1 Starter1.2 U2.27 | length 119
  Top Layer w0.254: Starter1.2 52.96,825.29 54.25,824 60,824 ; R10.2 60,824 ; v1(84.75,759) 84.75,799.5 82.25,802 78.35,802 73.526,806.824 73.526,815.968 70.494,819 65.5,819 64.25,820.25 62.5,820.25 C6.2 60,824
  Bottom Layer w0.254: U2.27 73.406,738.192 74.537,739.323 74.537,751.787 81.75,759 v1(84.75,759)
TRIG1: U2.63 UH1.2 | length 77.7
  Bottom Layer w0.254: UH1.2 15.21,746.73 55.626,787.146 U2.63
TRIG2: U2.66 UH2.2 | length 77.5
  Bottom Layer w0.254: UH2.2 26.46,753.637 59.487,786.663 59.487,788.992 58.166,790.313 U2.66
TRIG3: U2.43 UH3.2 | length 69.8
  Bottom Layer w0.254: UH3.2 40.389,724.154 92.404,724.154 93.715,725.465 93.715,737.24 U2.43
TRIG4: U2.42 UH4.2 | length 58.5
  Bottom Layer w0.254: UH4.2 50.793,725 90.203,725 91,725.797 91,730.579 92.317,731.896 92.317,737.786 91.186,738.917 U2.42
TX: Bluetooth1.2 U2.13 | length 55.1
  Top Layer w0.254: Bluetooth1.2 52.893,742.356 54.381,740.867 54.381,738.496 U2.13
V_BATT: C7.2 D3.K R8.2 R11.1 U2.20 | length 75.2
  Top Layer w0.254: R8.2 R11.1@29.444,792.5 ; 28.375,792.625 D3.K 29.604,796.34 C7.2 ; R11.1 29.854,778.646 v1(65,743.5)
  Bottom Layer w0.254: U2.20 65,741.545 v1(65,743.5)
pads on no net: "RC vez supp1.1" IC1.11 IC1.12 U1.6 U2.1 U2.3 U2.4 U2.5 U2.6 U2.8 U2.9 U2.10 U2.12 U2.16 U2.23 U2.25 U2.26 U2.34 U2.35 U2.36 U2.44 U2.45 U2.46 U2.47 U2.48 U2.49 U2.50 U2.51 U2.53 U2.55 U2.56 U2.57 U2.58 U2.59 U2.60 U2.65 U2.67 U2.68 U2.70 U2.71 U2.72 U2.73 U2.77 U2.78 U2.79 U2.81 U2.82 U2.83 U2.84 U2.85 U2.86 U2.87 U2.88 U2.89 U2.91 U2.92 U2.94 U2.98 U2.99 U2.100 U5.3 U5.4 U5.5 U5.6 U5.7 U5.8 U5.9 U5.10 U5.11 U5.12 U5.14 U5.16 U5.17 U5.18 U5.23 U5.24
copper on no net:
  other v2: 4,727.646 101.5,727.646 4,824.646 101.5,824.646

## Keep-outs
Keep-Out Layer:
  the board outline again, w0.254

## Other copper
Top Layer:
  text "BUGBUSTERS" at 4.826,802.64 h1.52 r90

## Silkscreen, mask and mechanical layers (free items; w line width, h text height)
Top Solder:
  lines w0.254: 0,723.671 0,828.671 105.5,828.671 105.5,723.671 0,723.671

## Text inside footprints (layer, text, board x,y; h text height)
C1: Top Overlay "+" at 33.984,807.613 h1.5 r270
C2: Top Overlay "+" at 55.574,807.613 h1.5 r270
C3: Top Overlay "+" at 44.779,807.613 h1.5 r270
P3: Top Overlay "1" at 82.21,821.888 h1.27; Top Overlay "5" at 96.434,821.888 h1.27; Top Overlay "10" at 96.434,824.428 h1.27; Top Overlay "6" at 82.21,824.428 h1.27
P4: Top Overlay "1" at 63.71,821.888 h1.27; Top Overlay "5" at 77.934,821.888 h1.27; Top Overlay "10" at 77.934,824.428 h1.27; Top Overlay "6" at 63.71,824.428 h1.27